# Altium PCB 1-Tamrin Aval.PcbDoc
Units mm, origin at the board's own origin, x right, y up, seen from the top; angles counter-clockwise.
Board outline 21.21 x 18.03 mm, 2 copper layers (Top Layer, Bottom Layer); 10 components, 7 nets, 21 pads, 1 vias.
Unrouted connection lines stored in the file: 2.
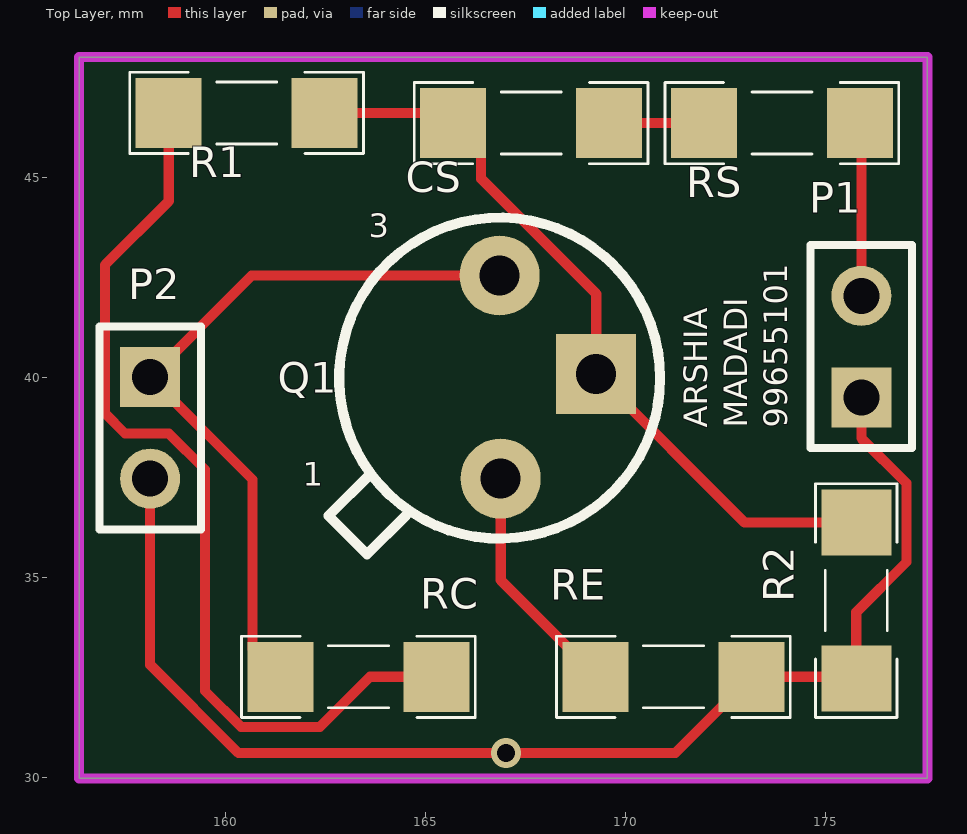
[diagram p0: Top Layer view]
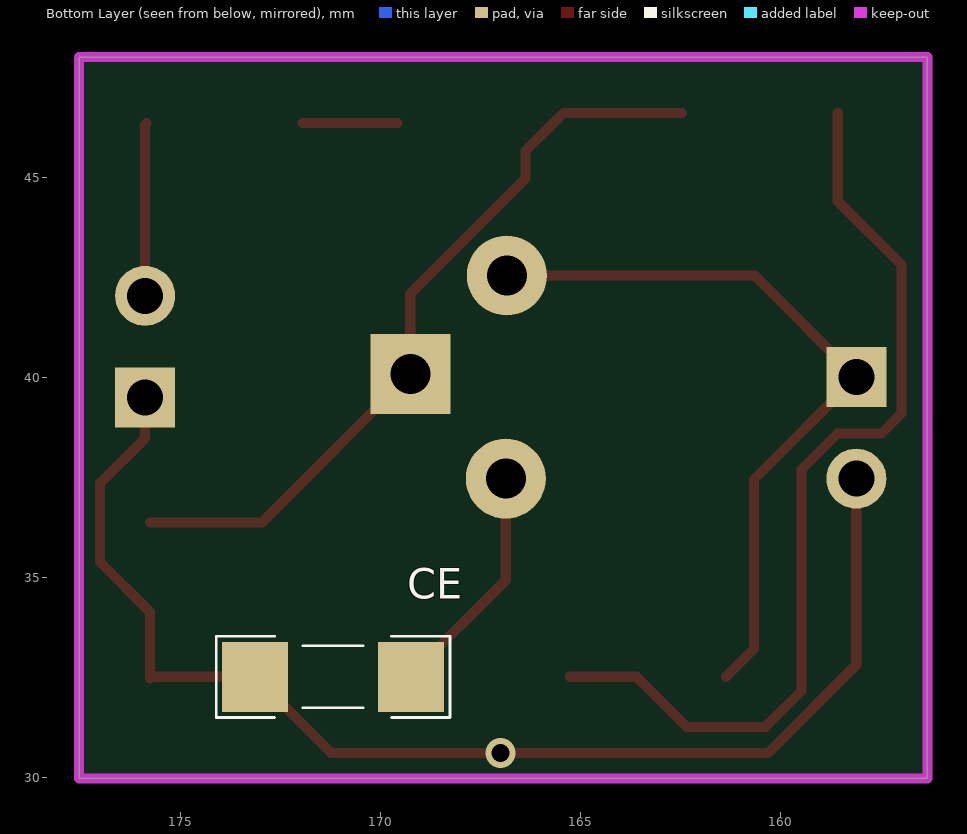
[diagram p1: Bottom Layer view, seen from below]
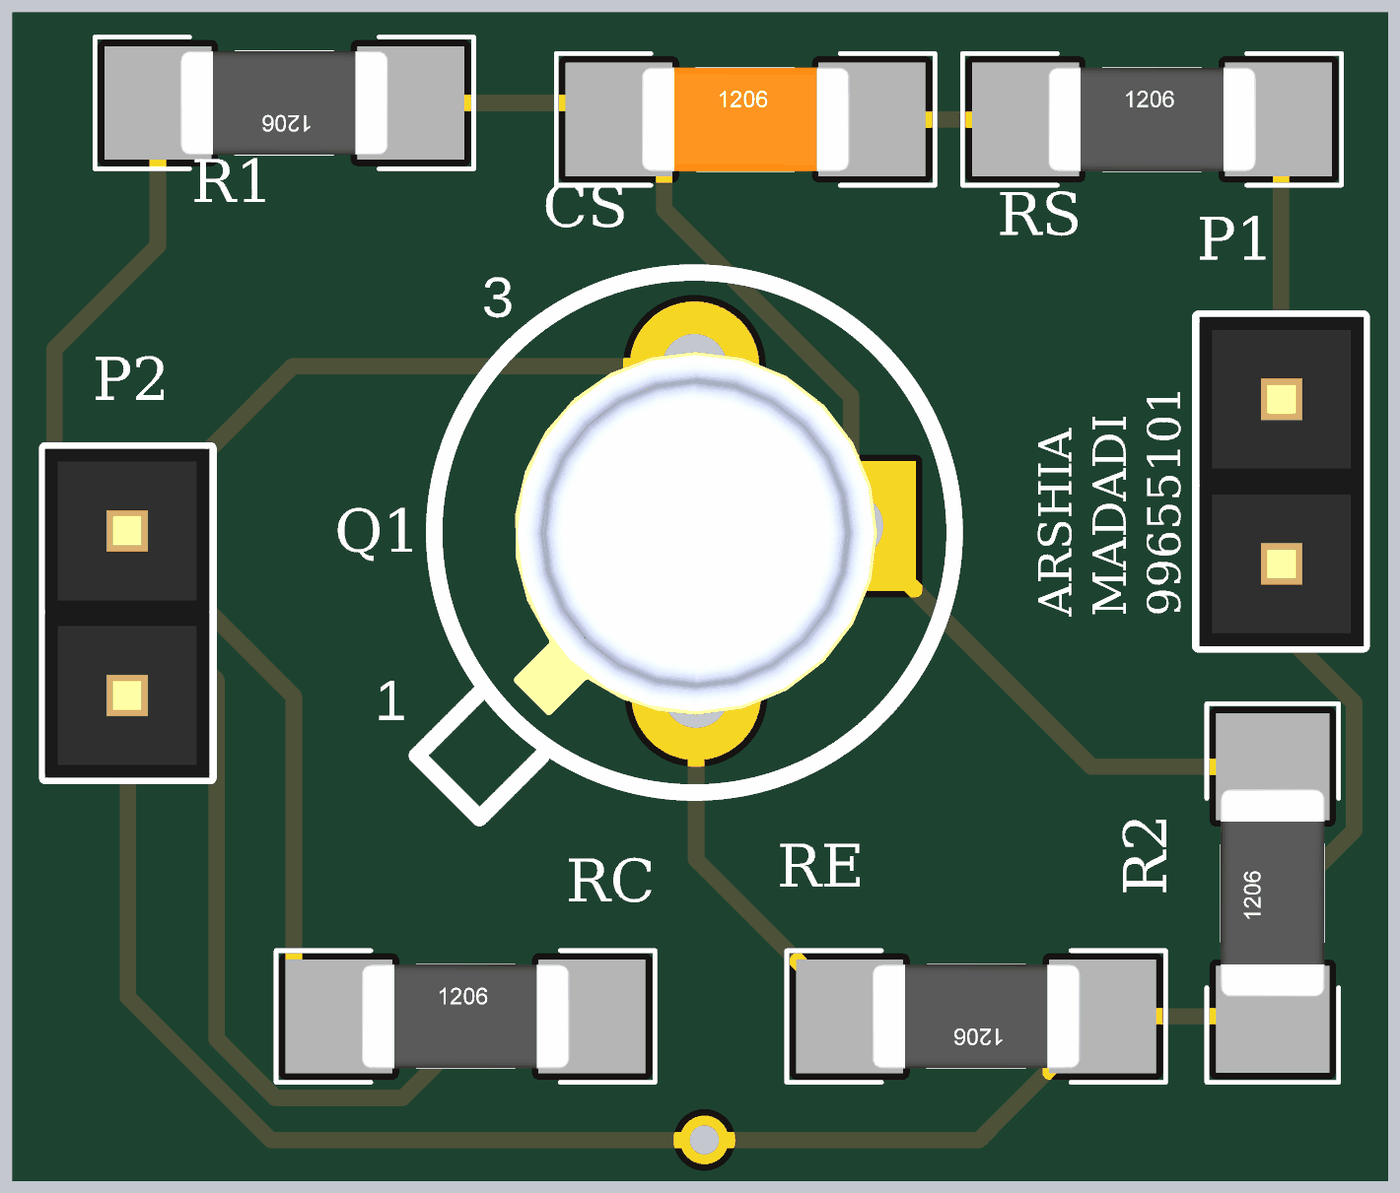
[diagram p2: 3D render of the assembled board from above, using the file's embedded part models]

## Layer stack, top to bottom
Top Solder: solder mask 0.0102, Solder Resist, Dk 3.5
Top Layer: signal copper 0.0356
Dielectric 1: dielectric 0.32, FR-4, Dk 4.8
Bottom Layer: signal copper 0.0356
Bottom Solder: solder mask 0.0102, Solder Resist, Dk 3.5

## Board outline
156.337,29.972 156.337,48.006 177.546,48.006 177.546,29.972

## Design rules (kind name [scope] priority, off if disabled: settings)
Clearance [All] p1: gap=0.254 ignorepadtopadclearanceinfootprint=FALSE except(0: Arc-Hole Track-Hole SMDPad-Hole THPad-Hole Via-Hole Fill-Hole Poly-Hole Region-Hole Text-Hole)
PolygonConnect [All] p1: connectstyle=Relief reliefconductorwidth=0.254 reliefentries=4 polygonreliefangle="90 Angle" airgapwidth=0.254
RoutingVias [All] p1: holewidth=0.711 width=1.27 viastyle="Through Hole" minholewidth=0.711 minwidth=1.27 maxholewidth=0.711 maxwidth=1.27
SolderMaskExpansion [All] p1: expansion=0.102 istentingtop=FALSE
Width [All] p1: maxlimit=0.254 minlimit=0.254 preferedwidth=0.254
30 further rules are at their usual default settings.

## Components (designator, comment, footprint, x,y, rotation, side; value= is the part's Value field where it differs from the comment)
CE "100uF" CAPC4817X12N 171.196,32.512 r180 bottom
CS "100uF" CAPC4817X12N 167.64,46.355 r0 top
P1 "Input" HDR1X2 175.895,39.497 r90 top
P2 "OutPot" HDR1X2 158.115,40.005 r270 top
Q1 "2N2222" 2N2222 166.878,37.465 r180 top
R1 "25K" RESC4817X04N 160.528,46.609 r180 top
R2 "25K" RESC4817X04N 175.768,34.417 r90 top
RC "2.5K" RESC4817X04N 163.322,32.512 r0 top
RE "1.8K" RESC4817X04N 171.196,32.512 r180 top
RS "1K" RESC4817X04N 173.908,46.355 r0 top

## Footprints (in the part's own frame and the unit in brackets; to place one, negate y for a bottom-side part, rotate by r counter-clockwise, add the part's x,y. Pads: shape width x height; smd on the part's side, far side on the other; paste and mask are expansions set on the pad)
2N2222 [mm] "NPN Transistor"
  round 2 hole 1: 1(0,0) 3(0.025,-5.08)
  rect 2x2 hole 1: 2(-2.388,-2.616)
  silkscreen extent -3.99,-6.53 4.31,1.89, body extent -2.79,-5.3 2.81,0.3, height 6.6
CAPC4817X12N [mm] "Chip Capacitor, 2-Leads, Body 4/80x1/70mm, IPC Medium Density-Design:Abbas Basereh"
  rect 1.65x1.75 smd: 1(-1.95,0) 2(1.95,0)
  silkscreen extent -2.92,-1.02 2.92,1.02, body extent -1.6,-0.8 1.6,0.8, height 1
HDR1X2 [mm] "Connector; Header; 2 Position"
  rect 1.5x1.5 hole 0.9: 1(0,0)
  round 1.5 hole 0.9: 2(2.54,0)
  silkscreen extent -1.27,-1.27 3.81,1.27, body extent -1.27,-1.28 3.81,1.26, height 8.79
RESC4817X04N [mm] "Chip Resistor, 2-Leads, Body 4/80x1/70mm, IPC Medium Density-Design:Abbas Basereh"
  rect 1.65x1.75 smd: 1(-1.95,0) 2(1.95,0)
  silkscreen extent -2.92,-1.02 2.92,1.02, body extent -1.6,-0.8 1.6,0.8, height 1

## Part data
CE CS: library part "CAP SMD 1206", "CAP 1206", Data=16-12-2016, Desc.="CAP SMD 1206", Designer="Abbas Basereh"
P1 P2: library part "Header 2", "Header, 2-Pin", LatestRevisionDate=17-Jul-2002, LatestRevisionNote="Re-released for DXP Platform.", Publisher="Altium Limited"
Q1: "NPN Transistor"
R1 R2 RC RE RS: library part "RES 1206 0.25W", "RES 1206", Data=16-12-2016, Desc.="RES SMD 1206", Designer="Abbas Basereh"

## Via types
v1: diameter 0.75, hole 0.45, Top Layer to Bottom Layer, 1 vias

## Nets (pads, with @x,y where several pads share a name; then routed paths per layer and width w, separated by ;. In a path a pad name is that pad's centre, name@x,y a point inside that pad or via, vN(x,y) a via of type N, cw(c..) or ccw(c..) an arc to the next point about the centre after c; other vN are vias at no path point)
+5: R1.2 RC.2 | length 23.5
  Top Layer w0.254: R1.2 158.578,44.405 156.984,42.811 156.984,39.097 157.485,38.596 158.583,38.596 159.486,37.693 159.486,32.159 160.389,31.256 162.355,31.256 163.611,32.512 RC.2
GND: CE.1 P1.1 P2.2 R2.1 RE.1 | length 32.1
  Top Layer w0.254: P2.2 158.115,32.812 160.32,30.607 171.241,30.607 172.398,31.764 172.448,31.764 173.146,32.462 RE.1 175.723,32.512 R2.1 175.768,34.128 177.024,35.384 177.024,37.35 175.895,38.479 P1.1
  other v1: 167.005,30.607
NetCE_2: CE.2 Q1.1 RE.2 | length 5.9
  Top Layer w0.254: Q1.1 166.878,34.93 169.246,32.562 RE.2
NetCS_1: CS.1 Q1.2 R1.1 R2.2 | length 19.1
  Top Layer w0.254: R1.1 165.436,46.609 CS.1 166.388,45.657 166.388,44.963 169.266,42.085 Q1.2 172.98,36.367 R2.2
NetCS_2: CS.2 RS.1 | length 2.4
  Top Layer w0.254: CS.2 RS.1
NetP1_2: P1.2 RS.2 | length 4.3
  Top Layer w0.254: RS.2 175.895,46.318 P1.2
NetP2_1: P2.1 Q1.3 RC.1 | length 18.6
  Top Layer w0.254: RC.1 160.674,33.21 160.674,37.446 P2.1 160.655,42.545 Q1.3

## Keep-outs
Keep-Out Layer:
  the board outline again, w0.254

## Silkscreen, mask and mechanical layers (free items; w line width, h text height)
Top Overlay:
  text "ARSHIA / MADADI / 99655101" at 174.244,38.735 h1 r90

## Text inside footprints (layer, text, board x,y; h text height)
Q1: Top Overlay "3" at 163.576,43.307 h1; Top Overlay "1" at 161.925,37.084 h1